# Altium PCB PCB1.PcbDoc
Units mil, origin at the board's own origin, x right, y up, seen from the top; angles counter-clockwise.
Board outline 1625 x 1370 mil, 2 copper layers (Top Layer, Bottom Layer); 16 components, 18 nets, 62 pads, 2 vias.
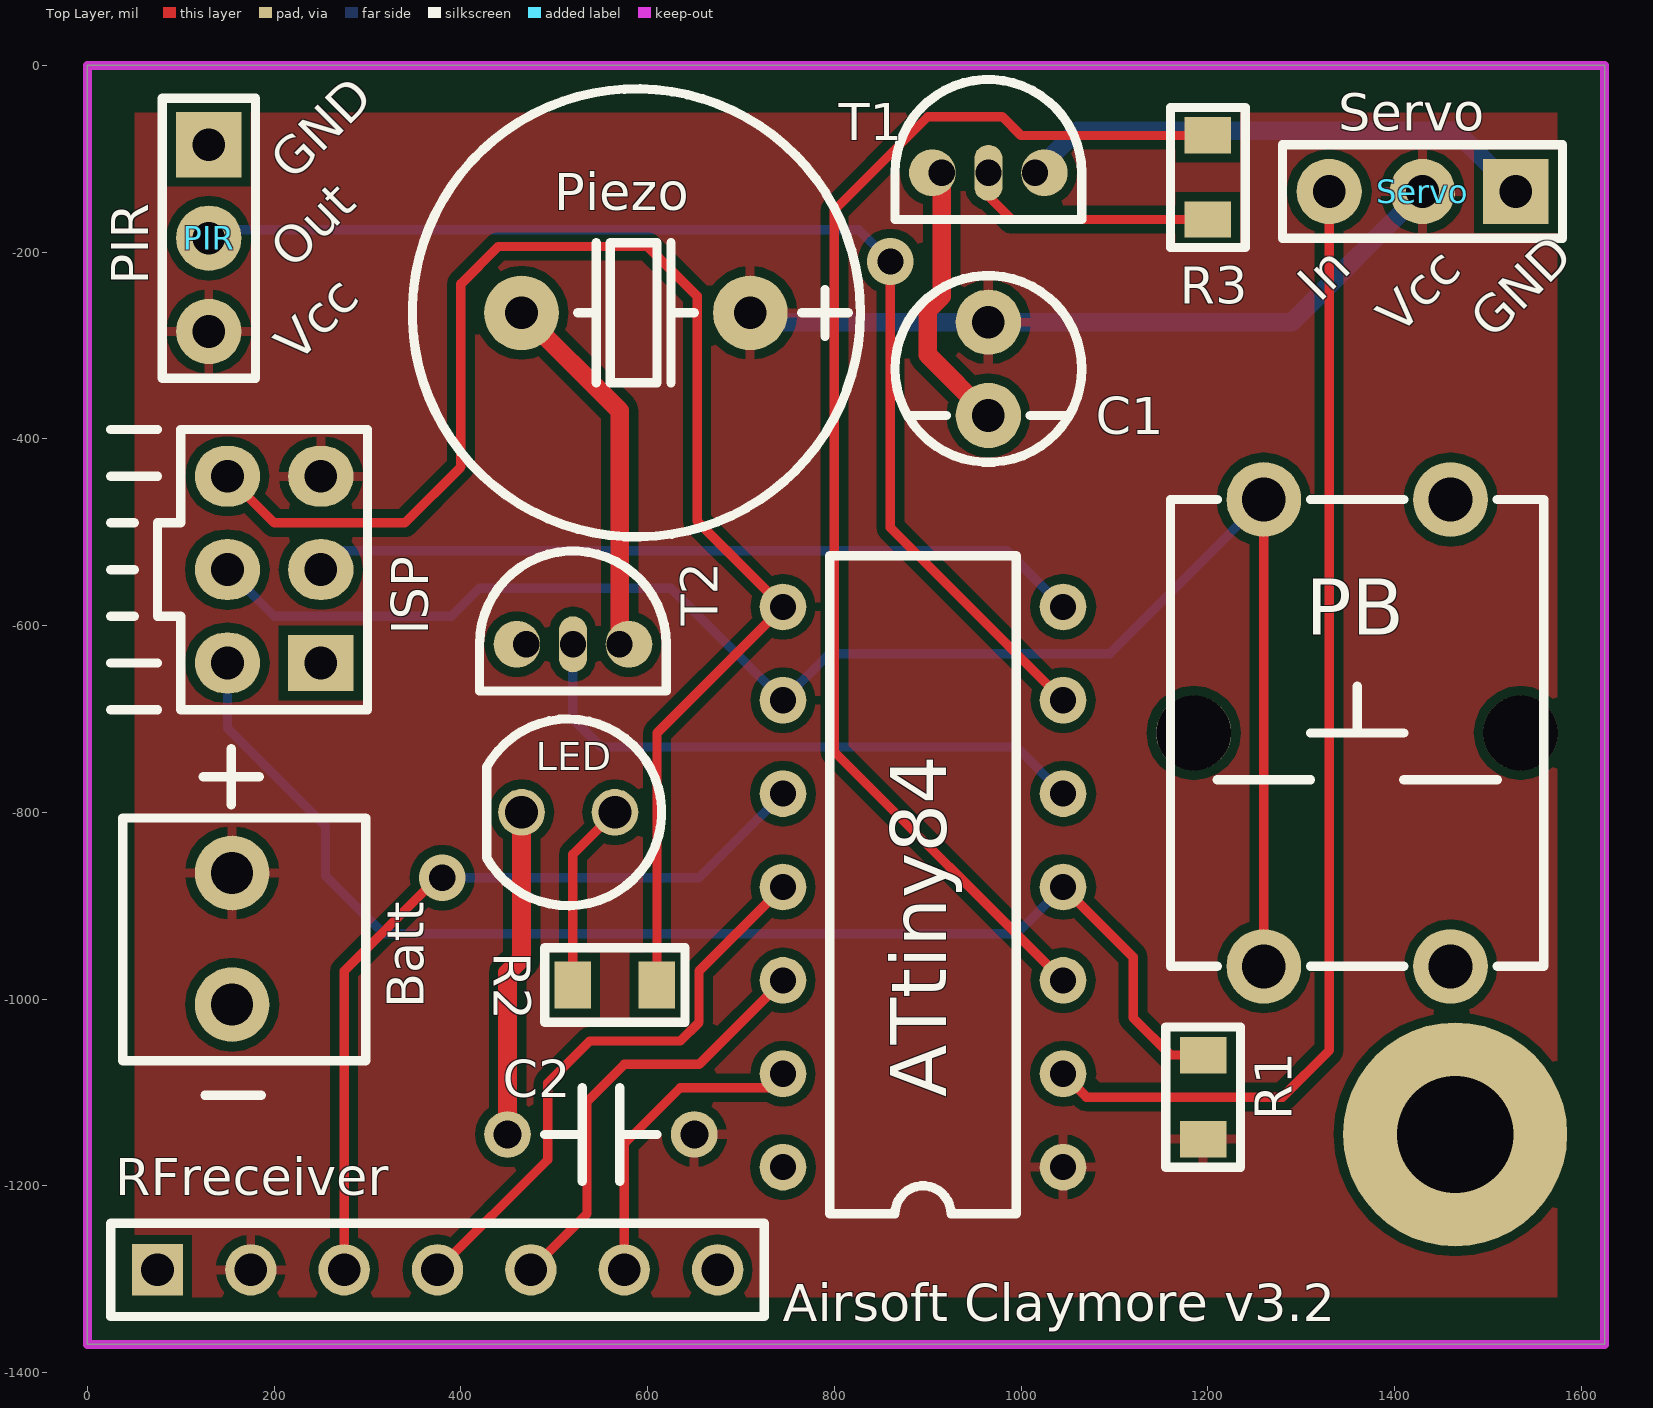
[diagram p0: Top Layer view]
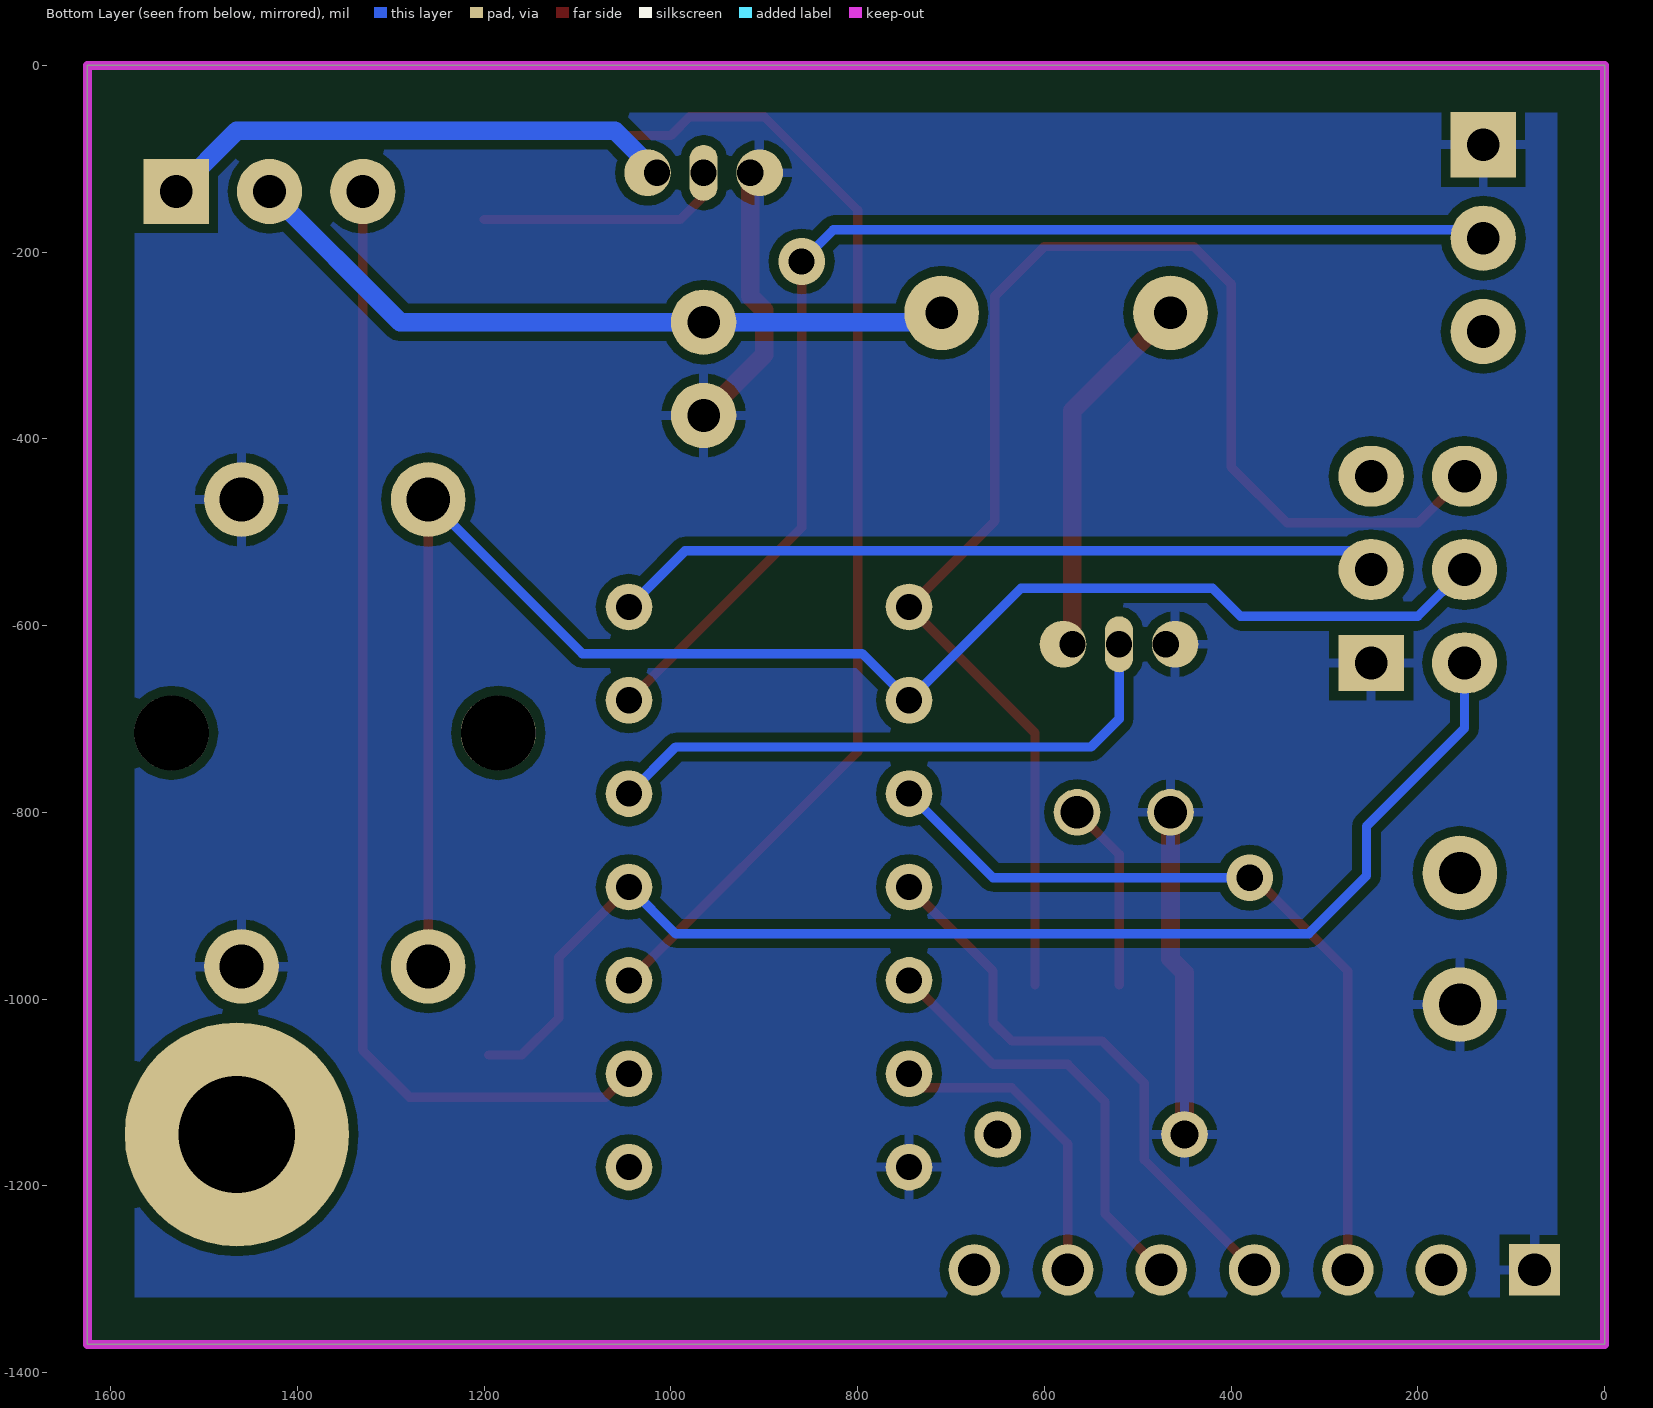
[diagram p1: Bottom Layer view, seen from below]

## Layer stack, top to bottom
Top Solder: solder mask 0.4, Solder Resist, Dk 3.5
Top Layer: signal copper 1.4
Dielectric 1: dielectric 12.6, FR-4, Dk 4.8
Bottom Layer: signal copper 1.4
Bottom Solder: solder mask 0.4, Solder Resist, Dk 3.5

## Board outline
0,-1370 0,0 1625,0 1625,-1370

## Design rules (kind name [scope] priority, off if disabled: settings)
BoardOutlineClearance [All] p1: gap=50
Clearance [All] p1: gap=10
HoleSize [All] p1: absolutevalues=TRUE maxlimit=150 minlimit=1 maxpercent=80.000 minpercent=20.000
PolygonConnect [All] p1: connectstyle=Relief reliefconductorwidth=10 reliefentries=4 polygonreliefangle="90 Angle" airgapwidth=10
RoutingVias [All] p1: holewidth=28 width=50 viastyle="Through Hole" minholewidth=28 minwidth=50 maxholewidth=28 maxwidth=50
SMDNeckDown [All] p1: percent=50.000
SilkToSilkClearance [All] p1: silktosilkclearance=1
SilkToSolderMaskClearance [IsPad] p1: minsilkscreentomaskgap=1 clearancetoexposedcopper=TRUE
SolderMaskExpansion [All] p1: expansion=4
Width "Servo negative" [InNet('NetServo_3')] p1: maxlimit=20 minlimit=20 preferedwidth=20
Width "Piezo negative" [InNet('NetPzo_2')] p2: maxlimit=20 minlimit=20 preferedwidth=20
Width GND [InNet('GND')] p3: maxlimit=20 minlimit=20 preferedwidth=20 minimp=50.000000 maximp=50.000000 favimp=50.000000
Width Vcc [InNet('VCC')] p4: maxlimit=20 minlimit=20 preferedwidth=20 minimp=50.000000 maximp=50.000000 favimp=50.000000
Width [All] p5: maxlimit=20 minlimit=10 preferedwidth=10 minimp=50.000000 maximp=50.000000 favimp=50.000000
27 further rules are at their usual default settings.

## Classes and differential pairs
component class Sheet1: ATtiny84 Batt C1 C2 ISP LED PB Piezo PIR R1 R2 R3 RFreceiver Servo T2

## Components (designator, comment, footprint, x,y, rotation, side; value= is the part's Value field where it differs from the comment)
ATtiny84 "ATtiny84" "SOC 7x2" 1045,-1180 r180 top (schematic designator IC)
Batt "Batt" "BATTERY - TERMINAL HOLDER SMALL" 155,-1006 r90 top
C1 "Electrolytic capacitor" "ELECTROLYTIC CAPACITOR 5X12 - HORIZONTAL" 965,-275 r270 top
C2 "Ceramic capacitor" "CERAMIC CAPACITOR" 650,-1145 r180 top
ISP "ISP header 2x3 male" "ISP HEADER 2X3 MALE" 150,-640 r90 top
LED "LED 5mm" "LED 5MM RED" 565,-800 r180 top
PB "PB" "PUSHBUTTON BIG" 1260,-965 r90 top
Piezo "Piezo" "PIEZO (ENCAPSULATED)" 710,-265 r180 top (schematic designator Pzo)
PIR "PIR" PIR 130,-285 r90 top
R1 "Resistor" "Resistor SMD 0805" 1195,-1105 r270 top
R2 "Resistor" "Resistor SMD 0805" 565,-985 r180 top
R3 "Resistor" "Resistor SMD 0805" 1200,-120 r90 top
RFreceiver "RF receiver" "4 channel 315mhz RF reciever" 675,-1290 r180 top (schematic designator RFrec?)
Servo "SER" "SERVO - 3 PIN 90º" 1330,-135 r0 top
T1 "PN2222a" PN2222A 915,-115 r0 top
T2 "PN2222a" PN2222A 470,-620 r0 top

## Footprints (in the part's own frame and the unit in brackets; to place one, negate y for a bottom-side part, rotate by r counter-clockwise, add the part's x,y. Pads: shape width x height; smd on the part's side, far side on the other; paste and mask are expansions set on the pad)
"4 channel 315mhz RF reciever" [mil]
  round 55 hole 35: 1(0,0) 2(100,0) 3(200,0) 4(300,0) 5(400,0) 6(500,0)
  rect 55x55 hole 35: 7(600,0)
  silkscreen extent -50,-50 650,50, body extent -965,-10 650,1236, height 140
"BATTERY - TERMINAL HOLDER SMALL" [mil]
  round 80 hole 45: 1(141,0) 2(0,0)
  silkscreen extent -97,-143 274,117, body extent -68,-151 208,125, height 345
"CERAMIC CAPACITOR" [mil]
  round 50 hole 30: 1(0,0) 2(200,0)
  silkscreen extent 40,-50 160,50, body extent -9,-39 211,40, height 247
"ELECTROLYTIC CAPACITOR 5X12 - HORIZONTAL" [mil]
  round 70 hole 35: 1(0,0) 2(100,0)
  silkscreen extent -50,-100 150,100, body extent -75,-5 173,499, height 254
"ISP HEADER 2X3 MALE" [mil] "ISP header 2x3 male"
  oval 65x70 hole 35: 1(200,0) 2(100,0) 3(0,0) 5(100,-100) 6(200,-100)
  rect 60x70 hole 35: 4(0,-100)
  silkscreen extent -50,-150 250,125, body extent -47,-148 253,52, height 360
"LED 5MM RED" [mil]
  round 50 hole 35: 1(0,0) 2(100,0)
  silkscreen extent -50,-100 137,100, body extent -66,-114 148,118, height 335
"PIEZO (ENCAPSULATED)" [mil]
  round 80 hole 35: 1(0,0) 2(245,0)
  silkscreen extent -118,-240 362,240, body extent -107,-232 357,232, height 335
PIR [mil]
  round 70 hole 35: 1(0,0) 2(100,0)
  rect 70x70 hole 35: 3(200,0)
  silkscreen extent -50,-50 250,50, body extent -50,-50 250,295, height 170
PN2222A [mil]
  round 50 hole 28 copper offset -10,0: 1(0,0)
  oval 30x60 hole 28: 2(50,0)
  round 50 hole 28 copper offset 10,0: 3(100,0)
  silkscreen extent -50,-50 150,100, body extent -44,-62 144,95, height 319
"PUSHBUTTON BIG" [mil]
  round 80 hole 80 unplated: 0(250,75) 0(250,-275)
  round 80 hole 47: 1(0,0) 1(500,0) 2(0,-200) 2(500,-200)
  silkscreen extent 0,-300 500,100, body extent -6,-357 506,155, height 486
"Resistor SMD 0805" [mil]
  rect 39x50 smd: 1(-45,0) 2(45,0)
  silkscreen extent -75,-40 75,40, body extent -41,-27 41,27, height 24
"SERVO - 3 PIN 90º" [mil] "Headers for a servo motor"
  round 70 hole 35: 1(0,0) 2(100,0)
  rect 70x70 hole 35: 3(200,0)
  silkscreen extent -50,-50 250,50, body extent -50,-50 250,295, height 155
"SOC 7x2" [mil] "14-Pin Dual In-Line SOC Headers"
  round 50 hole 28: 1(0,0) 2(0,-100) 3(0,-200) 4(0,-300) 5(0,-400) 6(0,-500) 7(0,-600) 8(300,-600) 9(300,-500) 10(300,-400) 11(300,-300) 12(300,-200) 13(300,-100) 14(300,0)
  silkscreen extent 50,-655 250,50, body extent -48,-676 347,80, height 306

## Part data
Batt: library part "Battery - Terminal header small", "Connector for cables from a battery holder"
PB: library part Pushbutton
Piezo: library part "Piezo (Encapsulated)"
RFreceiver: library part "4 channel 315mhz RF reciever"
Servo: library part Servo

## Free pads (board coordinates)
  round 240 hole 125: 0(1465,-1145)

## Via types
v1: diameter 50, hole 28, Top Layer to Bottom Layer, 2 vias

## Nets (pads, with @x,y where several pads share a name; then routed paths per layer and width w, separated by ;. In a path a pad name is that pad's centre, name@x,y a point inside that pad or via, vN(x,y) a via of type N, cw(c..) or ccw(c..) an arc to the next point about the centre after c; other vN are vias at no path point)
GND: ATtiny84.14 Batt.2 C1.2 C2.2 ISP.4 LED.2 PB.2 PIR.3 RFreceiver.7 T1.1 T2.1 | length 644.4
  Top Layer w20: C2.2 450,-972 465,-957 LED.2 ; T1.1 915,-247.22 900,-262.22 900,-310 C1.2
NetIC_2: ATtiny84.2 Servo.1 | length 1236.1
  Top Layer w10: ATtiny84.2 1070,-1105 1280,-1105 1330,-1055 Servo.1
NetIC_3: ATtiny84.3 R3.2 | length 1376.2
  Top Layer w10: ATtiny84.3 800,-735 800,-155 900,-55 980,-55 1000,-75 R3.2
NetIC_4: ATtiny84.4 ISP.3 R1.1 | length 1370.5
  Top Layer w10: ATtiny84.4 1120,-955 1120,-1020 1160,-1060 R1.1
  Bottom Layer w10: ISP.3 150,-710 255,-815 255,-868 317,-930 995,-930 ATtiny84.4
NetIC_5: ATtiny84.5 T2.2 | length 638.1
  Bottom Layer w10: T2.2 520,-700 550,-730 995,-730 ATtiny84.5
NetIC_6: ATtiny84.6 PIR.2 | length 1294.4
  Top Layer w10: v1(860,-210) 860,-495 ATtiny84.6
  Bottom Layer w10: PIR.2 139,-176 826,-176 v1(860,-210)
NetIC_7: ATtiny84.7 ISP.5 | length 828.1
  Bottom Layer w10: ISP.5 270,-520 985,-520 ATtiny84.7
NetIC_8: ATtiny84.8 ISP.1 R2.1 | length 1615.1
  Top Layer w10: ISP.1 200,-490 340,-490 400,-430 400,-234 440,-194 600,-194 653,-247 653,-488 ATtiny84.8 610,-715 R2.1
NetIC_9: ATtiny84.9 ISP.2 PB.1 | length 1781.9
  Top Layer w10: PB.1@1260,-965 PB.1@1260,-465
  Bottom Layer w10: ISP.2 200,-590 390,-590 420,-560 625,-560 ATtiny84.9 795,-630 1095,-630 PB.1@1260,-465
NetIC_10: ATtiny84.10 RFreceiver.5 | length 868.7
  Top Layer w10: RFreceiver.5 275,-970 375,-870 v1(380,-870)
  Bottom Layer w10: v1(380,-870) 655,-870 ATtiny84.10
NetIC_11: ATtiny84.11 RFreceiver.4 | length 620.1
  Top Layer w10: RFreceiver.4 493,-1172 493,-1090 538,-1045 635,-1045 655,-1025 655,-970 ATtiny84.11
NetIC_12: ATtiny84.12 RFreceiver.3 | length 468.7
  Top Layer w10: RFreceiver.3 535,-1230 535,-1110 575,-1070 655,-1070 ATtiny84.12
NetIC_13: ATtiny84.13 RFreceiver.2 | length 336.1
  Top Layer w10: RFreceiver.2 575,-1155 635,-1095 730,-1095 ATtiny84.13
NetLED_1: LED.1 R2.2 | length 203.6
  Top Layer w10: R2.2 520,-845 LED.1
NetPzo_2: Piezo.2 T2.3 | length 398.5
  Top Layer w20: Piezo.2 570,-370 T2.3
NetR3_1: R3.1 T1.2 | length 270.4
  Top Layer w10: T1.2 965,-140 990,-165 R3.1
NetServo_3: Servo.3 T1.3 | length 560.6
  Bottom Layer w20: T1.3 1060,-70 1465,-70 Servo.3
VCC: ATtiny84.1 Batt.1 C1.1 C2.1 ISP.6 Piezo.1 PIR.1 R1.2 RFreceiver.6 Servo.2 | length 782.1
  Bottom Layer w20: Piezo.1 720,-275 C1.1 1290,-275 Servo.2
pads on no net: PB.0 RFreceiver.1

## Polygon pours and split planes (outlines as drawn)
GND on Bottom Layer "Bottom Layer-GND" (solid, remove dead copper, pour order 12): 0,0 1625,0 1625,-1370 5,-1370 0,-1365
VCC on Top Layer "VCC_L01_P014" (solid, remove dead copper, pour order 14): 0,0 1625,0 1625,-1370 0,-1370

## Keep-outs
Keep-Out Layer:
  the board outline again, w10

## Silkscreen, mask and mechanical layers (free items; w line width, h text height)
Top Overlay:
  text "Airsoft Claymore v3.2" at 745,-1345 h40

## Text inside footprints (layer, text, board x,y; h text height)
PIR: Top Overlay "Vcc" at 225,-320 h40 r45; Top Overlay "Out" at 220,-220 h40 r45; Top Overlay "GND" at 220,-125 h40 r45
Servo: Top Overlay "Vcc" at 1405,-290 h40 r45; Top Overlay "In" at 1320,-255 h40 r45; Top Overlay "GND" at 1505,-295 h40 r45